# Altium PCB rect.PcbDoc
Units mm, origin at the board's own origin, x right, y up, seen from the top; angles counter-clockwise.
Board outline 40 x 40 mm, 2 copper layers (Top Layer, Bottom Layer); 9 components, 6 nets, 21 pads, 0 vias.
Unrouted connection lines stored in the file: 15.
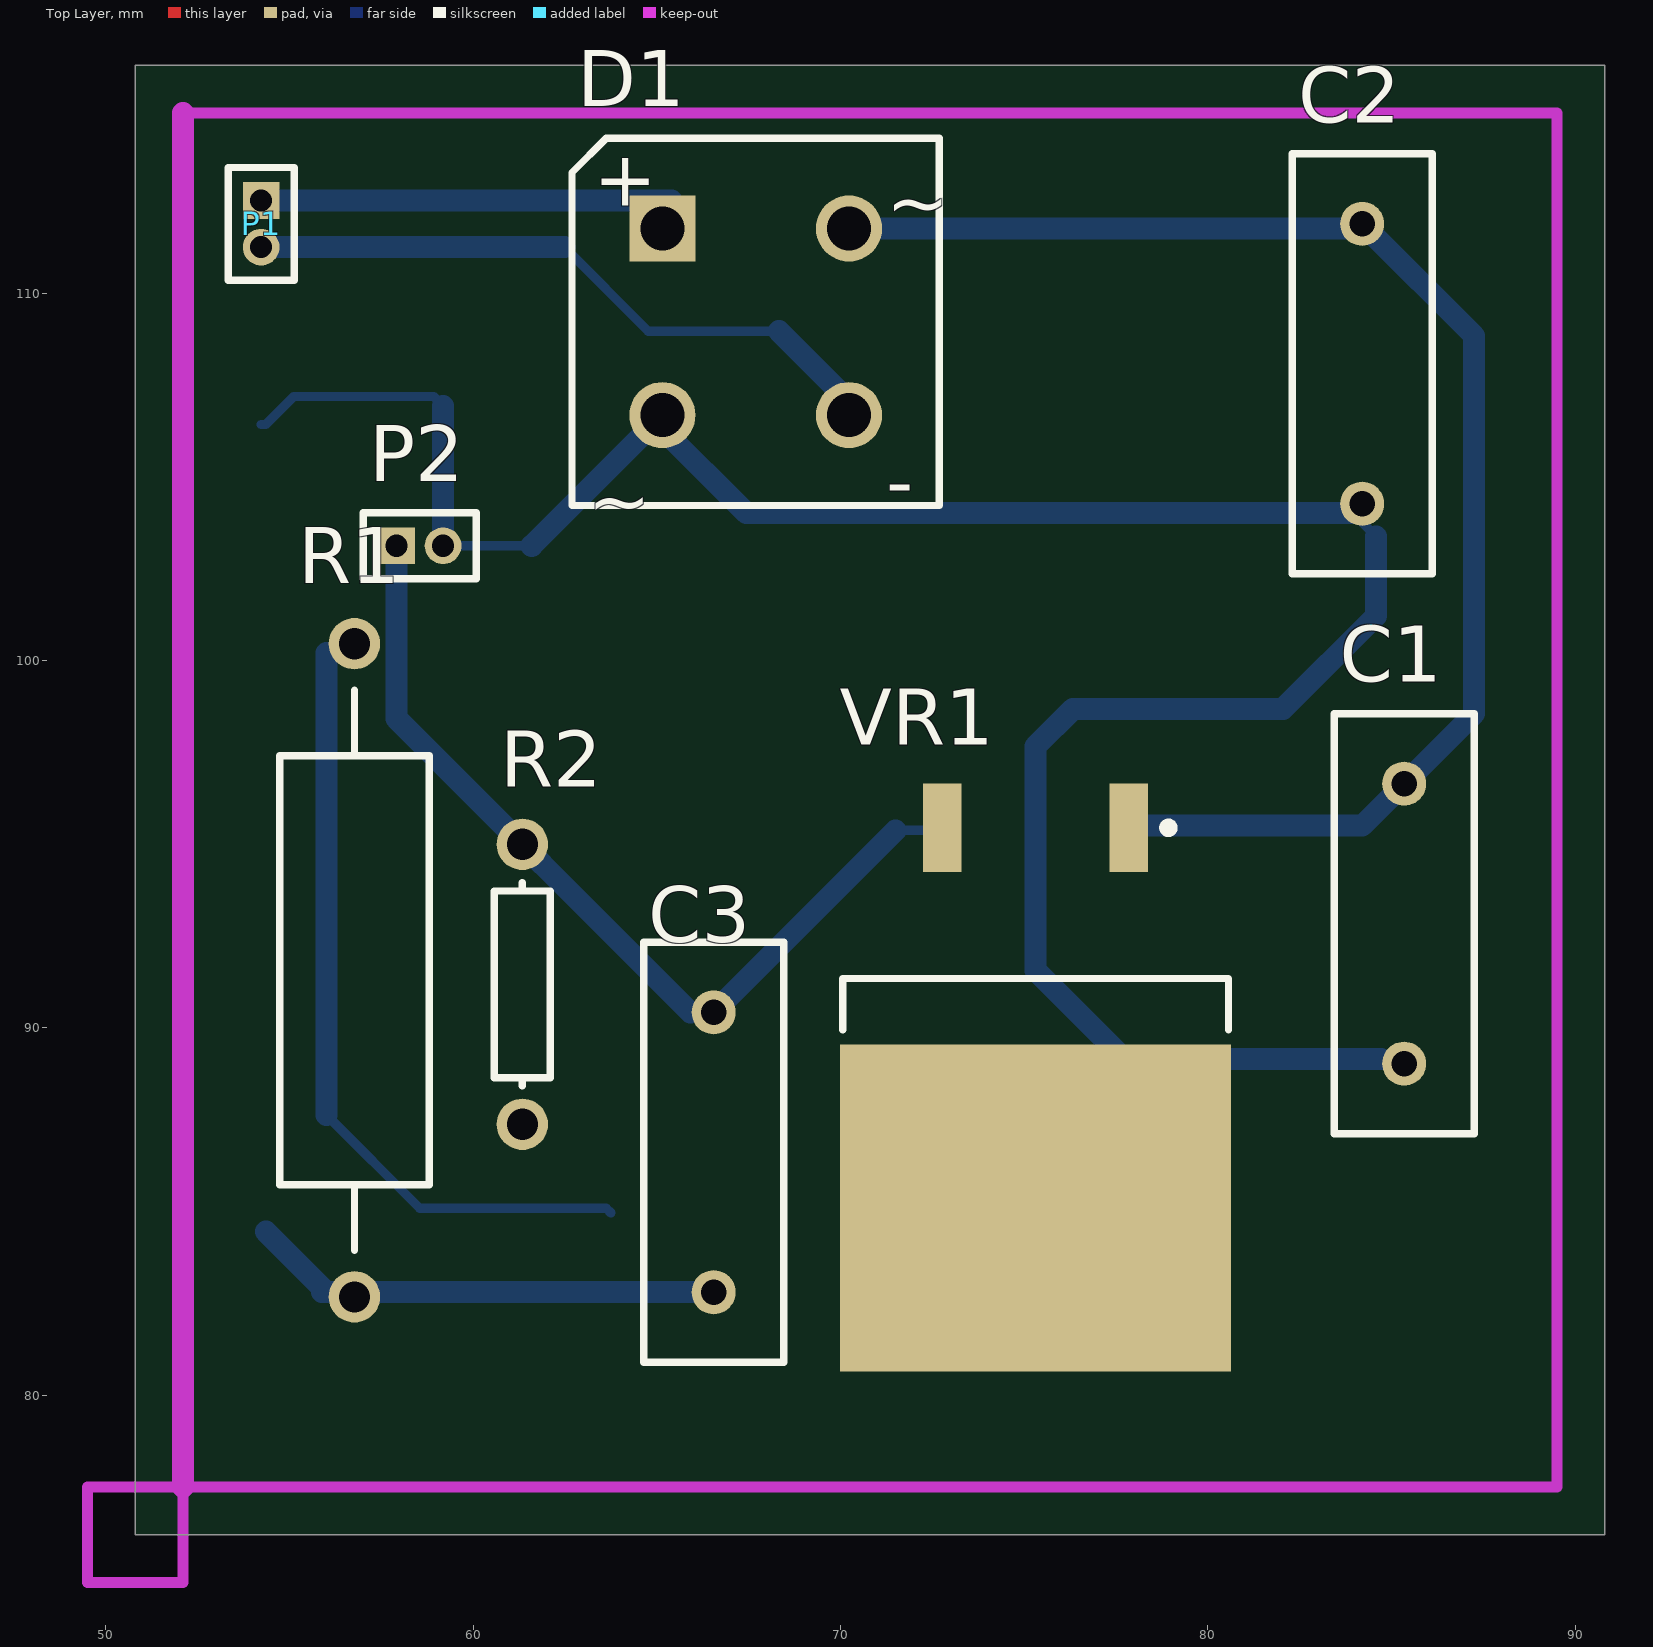
[diagram p0: Top Layer view]
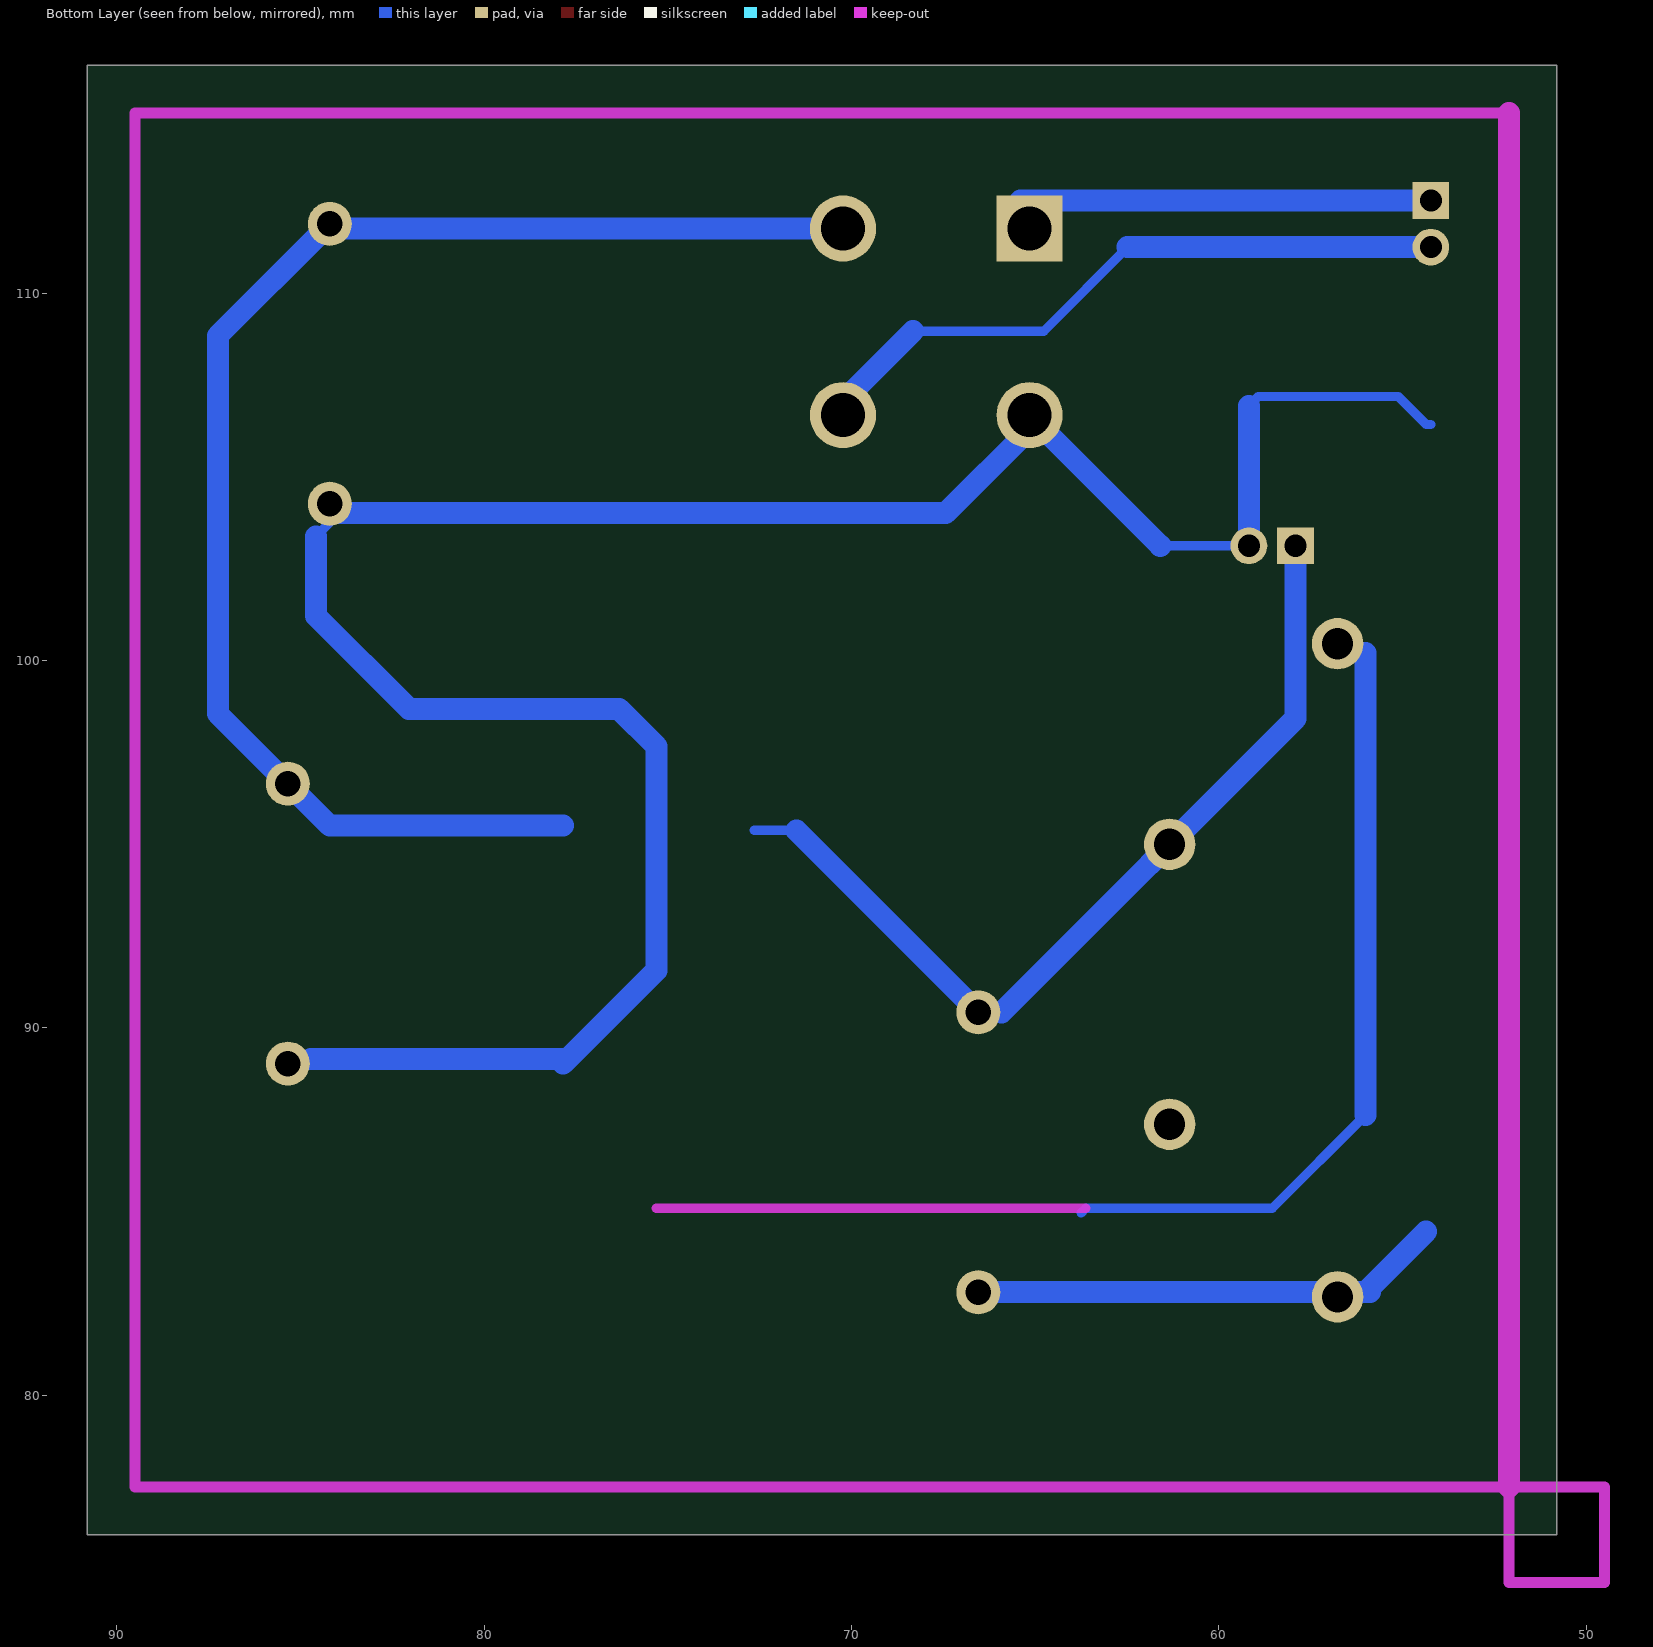
[diagram p1: Bottom Layer view, seen from below]

## Layer stack, top to bottom
Top Solder: solder mask 0.0102, Solder Resist, Dk 3.5
Top Layer: signal copper 0.0356
Dielectric 1: dielectric 0.32, FR-4, Dk 4.8
Bottom Layer: signal copper 0.0356
Bottom Solder: solder mask 0.0102, Solder Resist, Dk 3.5

## Board outline
50.8,76.2 90.8,76.2 90.8,116.2 50.8,116.2

## Design rules (kind name [scope] priority, off if disabled: settings)
Clearance [All] p1: gap=0.6
PolygonConnect [All] p1: connectstyle=Relief reliefconductorwidth=0.254 reliefentries=4 polygonreliefangle="90 Angle" airgapwidth=0.254
RoutingLayers [All] p1: top layer_v5=FALSE bottom layer_v5=TRUE
RoutingVias [All] p1: holewidth=0.6 width=1 viastyle="Through Hole" minholewidth=0.711 minwidth=1.27 maxholewidth=0.711 maxwidth=1.27
SolderMaskExpansion [All] p1: expansion=0.102
Width [All] p1: maxlimit=0.6 minlimit=0.254 preferedwidth=0.6 toplayer_minwidth=0.6 minimp=50.000000 maximp=50.000000 favimp=50.000000
29 further rules are at their usual default settings.

## Classes and differential pairs
component class rect: C1 C2 C3 D1 P2 R1 R2 VR1

## Components (designator, comment, footprint, x,y, rotation, side; value= is the part's Value field where it differs from the comment)
C1 "Cap" RAD-0.3 85.344,92.837 r90 top
C2 "Cap" RAD-0.3 84.201,108.077 r90 top
C3 "Cap" RAD-0.3 66.548,86.614 r90 top
D1 "Bridge1" D-38 67.691,109.22 r0 top
P1 "MHDR1X2" MHDR1X2 54.229,112.522 r270 top
P2 "MHDR1X2" MHDR1X2 57.912,103.124 r0 top
R1 "Res Adj1" AXIAL-0.7 56.769,91.567 r90 top
R2 "Res1" AXIAL-0.3 61.341,91.186 r90 top
VR1 "Volt Reg" D2PAK_N 75.311,88.646 r270 top

## Footprints (in the part's own frame and the unit in brackets; to place one, negate y for a bottom-side part, rotate by r counter-clockwise, add the part's x,y. Pads: shape width x height; smd on the part's side, far side on the other; paste and mask are expansions set on the pad)
AXIAL-0.3 [mm] "Axial Device, Thru-Hole; 2 Leads; 0.3 in Pin Spacing"
  round 1.4 hole 0.85: 1(-3.81,0) 2(3.81,0)
  silkscreen extent -2.77,-0.76 2.77,0.76
AXIAL-0.7 [mm] "Axial Device, Thru-Hole; 2 Leads; 0.7 in Pin Spacing"
  round 1.4 hole 0.85: 1(-8.89,0) 2(8.89,0)
  silkscreen extent -7.62,-2.03 7.62,2.03
D2PAK_N [mm] "D2-PAK, 4-Leads, Body 8.8x10.4mm, Pitch 2.54mm, Lead Span 15.1mm, IPC Medium Density"
  rect 2.4x1.05 smd: 1(-6.8,2.54) 3(-6.8,-2.54)
  rect 8.9x10.65 smd: 2(3.55,0)
  silkscreen extent -6.92,-5.25 -1.3,5.25, body extent -2.7,-5.28 6.3,5.28, height 4.69
D-38 [mm] "Bridge Rectifier; 4 Terminals; Body 9.4 x 9.4 mm (typ); Pitch 5.08 mm"
  rect 1.8x1.8 hole 1.2: 1(-2.54,2.54)
  round 1.8 hole 1.2: 2(-2.54,-2.54) 3(2.54,-2.54) 4(2.54,2.54)
  silkscreen extent -5,-5 5,5, body extent -5,-5 5,5, height 9.91
MHDR1X2 [mm] "Connector; Header; 2 Position"
  rect 1x1 hole 0.6: 1(0,0)
  round 1 hole 0.6: 2(1.27,0)
  silkscreen extent -0.9,-0.9 2.17,0.9
RAD-0.3 [mm] "Radial Cap, Thru-Hole; 2 Leads; 0.3 in Pin Spacing"
  round 1.2 hole 0.7: 1(-3.81,0) 2(3.81,0)
  silkscreen extent -5.71,-1.91 5.71,1.91

## Part data
C1 C2 C3: "Capacitor"
D1: "Full Wave Diode Bridge"
P1 P2: "Header, 2-Pin"
R1: "Variable Resistor"
R2: "Resistor"
VR1: "Voltage Regulator"

## Nets (pads, with @x,y where several pads share a name; then routed paths per layer and width w, separated by ;. In a path a pad name is that pad's centre, name@x,y a point inside that pad or via, vN(x,y) a via of type N, cw(c..) or ccw(c..) an arc to the next point about the centre after c; other vN are vias at no path point)
NetC1_1: C1.1 C2.1 C3.1 D1.2 P2.2 R1.1
NetC1_2: C1.2 C2.2 D1.4 VR1.1
NetC3_2: C3.2 P2.1 R2.2 VR1.3
NetD1_1: D1.1 P1.1
NetD1_3: D1.3 P1.2
NetR1_2: R1.2 R2.1 VR1.2
copper on no net: | length 195.3
  Bottom Layer w0.254: 54.229,106.426 54.356,106.426 55.118,107.188 58.928,107.188 59.182,106.934 ; 55.88,82.804 55.88,82.931 ; 56.007,87.63 58.547,85.09 63.627,85.09 63.754,84.963 ; 56.007,100.203 56.134,100.33 ; 59.182,103.124 61.595,103.124 ; 62.484,111.252 64.77,108.966 68.326,108.966 68.326,108.839 ; 65.151,106.299 65.151,106.68 ; 65.405,112.522 65.532,112.395 ; 65.913,90.424 66.548,90.424 ; 70.231,106.68 70.231,107.061 ; 71.501,95.377 72.009,95.377 ; 71.755,95.377 72.644,95.377 ; 83.947,104.013 84.582,103.378 ; 84.709,89.154 84.836,89.027
  Bottom Layer w0.6: 54.229,111.252 62.484,111.252 ; 54.229,112.522 65.405,112.522 ; 54.356,84.455 55.88,82.931 ; 55.88,82.804 66.548,82.804 ; 56.007,87.63 56.007,100.203 ; 57.912,103.124 57.912,98.425 65.913,90.424 ; 59.182,103.124 59.182,106.934 ; 61.595,103.124 65.151,106.68 ; 65.151,106.299 67.437,104.013 83.947,104.013 ; 66.548,90.424 71.501,95.377 ; 68.326,108.966 70.231,107.061 ; 70.231,111.76 83.82,111.76 ; 77.724,89.154 84.709,89.154 ; 77.851,89.027 75.311,91.567 75.311,97.663 76.327,98.679 82.042,98.679 84.582,101.219 84.582,103.378 ; 77.851,95.504 84.201,95.504 87.249,98.552 87.249,108.839 84.328,111.76

## Keep-outs
Bottom Layer:
  lines w0.254: 63.627,85.09 75.311,85.09
Keep-Out Layer:
  lines w0.3: 52.1,114.9 89.5,114.9 89.5,77.5 52.1,77.5 ; 52.1,77.5 49.5,77.5 49.5,74.9 52.1,74.9 52.1,77.5
  lines w0.6: 52.1,77.5 52.1,114.9

## Silkscreen, mask and mechanical layers (free items; w line width, h text height)
Mechanical 5:
  lines w0.3: 54.229,84.582 54.229,106.172
Drill Drawing:
  text "PCBTEST" at 77.343,81.661 h1.52
  text "R.Borumandi" at 69.469,78.74 h1.52

## Dimensions
50.8,76.2 to 52.1,77.5 on Mechanical 1
50.8,76.2 to 52.1,77.5 on Mechanical 1

## Text inside footprints (layer, text, board x,y; h text height)
D1: Top Overlay "+" at 63.281,112.384 h1.5; Top Overlay "-" at 71.247,104.14 h1.5; Top Overlay "~" at 63.119,103.632 h1.5; Top Overlay "~" at 71.247,111.76 h1.5